# Altium PCB ADCS_BOARD.PcbDoc
Units mm, origin at the board's own origin, x right, y up, seen from the top; angles counter-clockwise.
Board outline 92.58 x 92.46 mm, 2 copper layers (Top Layer, Bottom Layer); 139 components, 123 nets, 584 pads, 134 vias.
Unrouted connection lines stored in the file: 65.
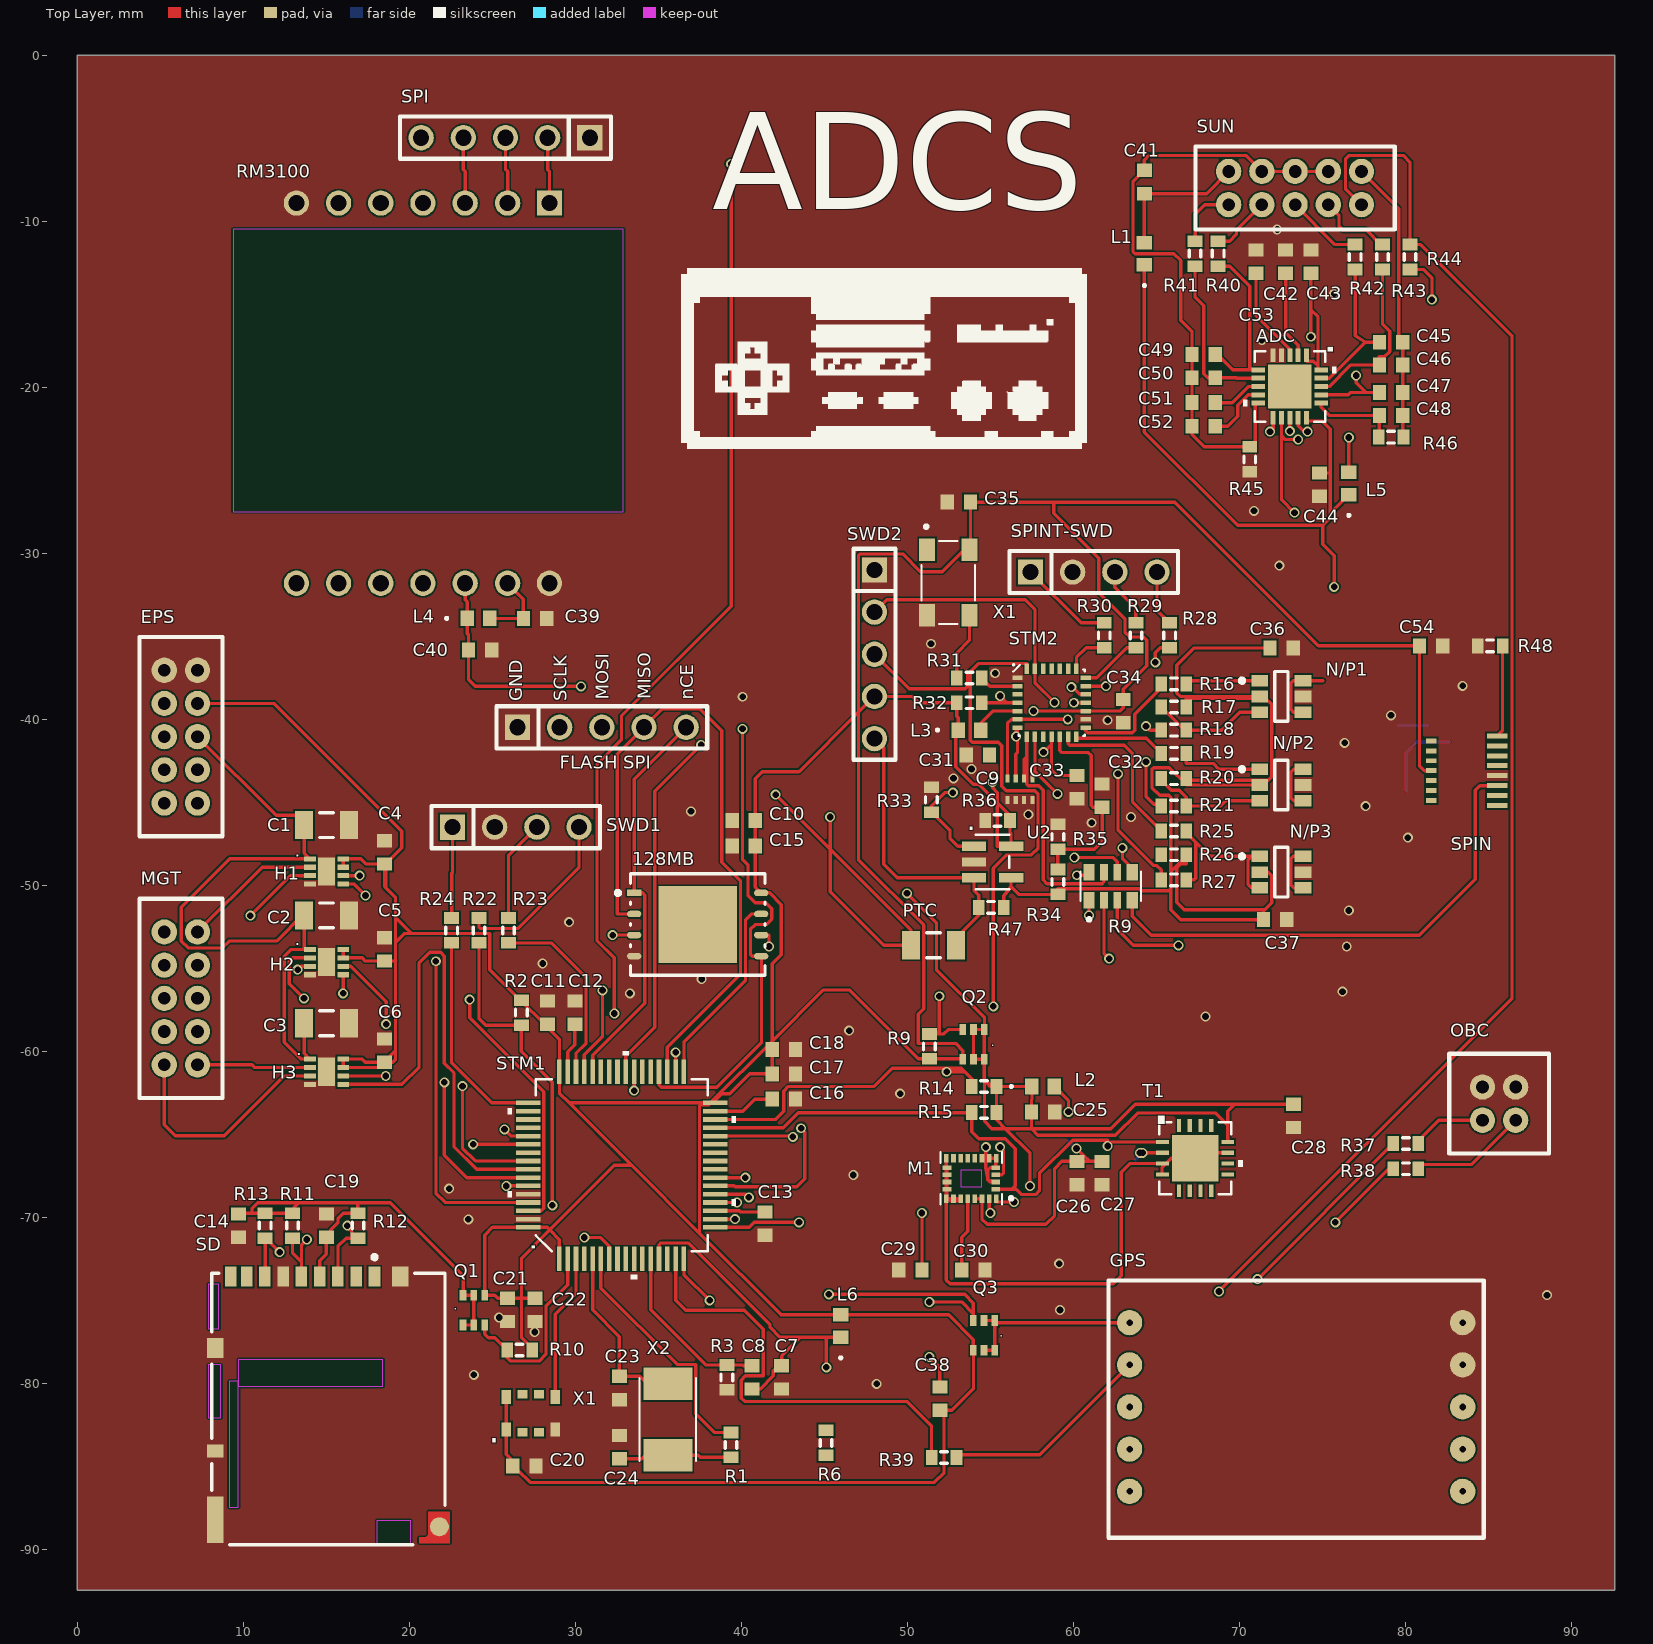
[diagram p0: Top Layer view]
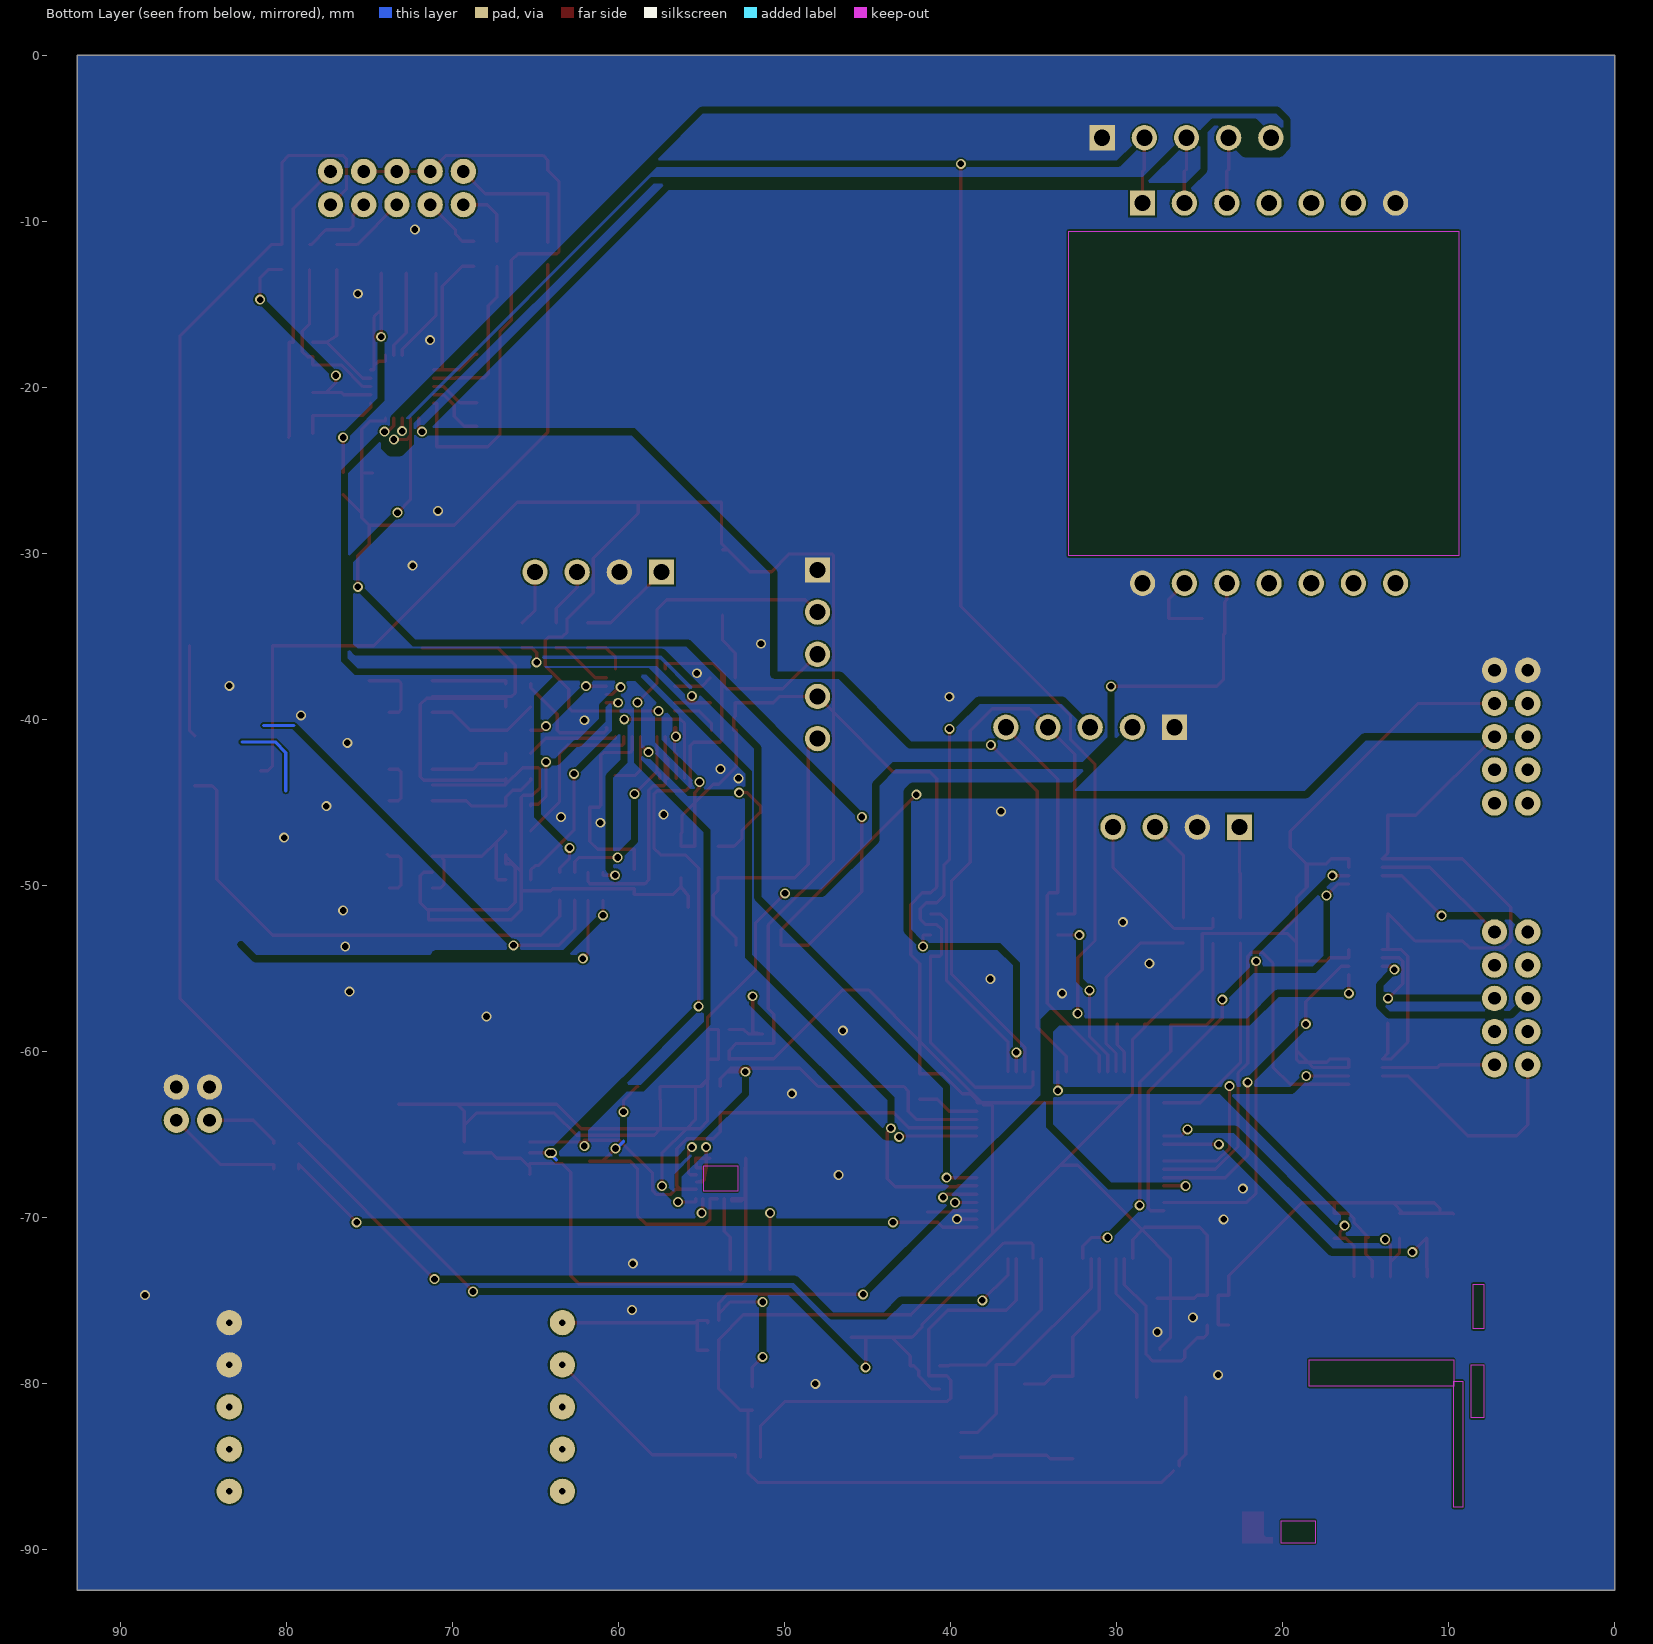
[diagram p1: Bottom Layer view, seen from below]

## Layer stack, top to bottom
Top Solder: solder mask 0.0102, Solder Resist, Dk 3.5
Top Layer: signal copper 0.0356
Dielectric 1: dielectric 0.32, FR-4, Dk 4.8
Bottom Layer: signal copper 0.0356
Bottom Solder: solder mask 0.0102, Solder Resist, Dk 3.5

## Board outline
0,-92.456 92.583,-92.456 92.583,0 0,0

## Design rules (kind name [scope] priority, off if disabled: settings)
Clearance [All] p1: gap=0.1 ignorepadtopadclearanceinfootprint=FALSE
PolygonConnect [All] p1: connectstyle=Direct reliefconductorwidth=0.254 reliefentries=4 polygonreliefangle="90 Angle" airgapwidth=0.254
RoutingTopology [All] p1: topology=Daisy_Simple
RoutingVias [All] p1: holewidth=0.4 width=0.6 viastyle="Through Hole" minholewidth=0.4 minwidth=0.6 maxholewidth=0.4 maxwidth=0.6
SolderMaskExpansion [All] p1: expansion=0.05
UnRoutedNet [All] p1: checkbadconnections=TRUE
Width [All] p1: maxlimit=0.3 minlimit=0.1 preferedwidth=0.2 minimp=50.000000 maximp=50.000000 favimp=50.000000
28 further rules are at their usual default settings.

## Components (designator, comment, footprint, x,y, rotation, side; value= is the part's Value field where it differs from the comment)
128MB "Comment" ISSI_WSON-8_0 37.358,-52.347 r0 top
ADC "Comment" AD 73.025,-19.939 r270 top
C1 "C1" C1206 15,-46.355 r0 top
C2 "C2" C1206 15,-51.8 r0 top
C3 "C3" C1206 15,-58.3 r0 top
C4 "Comment" 1608[0603] 18.5,-48.006 r90 top
C5 "Comment" 1608[0603] 18.5,-53.848 r90 top
C6 "Comment" 1608[0603] 18.5,-59.944 r90 top
C7 "Comment" 1608[0603] 42.418,-79.629 r90 top
C8 "Comment" 1608[0603] 40.64,-79.629 r90 top
C9 "Comment" W2A4ZC104MAT2A 56.769,-44.196 r0 top
C10 "Comment" 1608[0603] 40.132,-46.08 r0 top
C11 "Comment" 1608[0603] 28.305,-57.658 r90 top
C12 "Comment" 1608[0603] 29.96,-57.658 r90 top
C13 "Comment" 1608[0603] 41.402,-70.363 r90 top
C14 "Comment" 1608[0603] 9.688,-70.485 r90 top
C15 "Comment" 1608[0603] 40.132,-47.625 r0 top
C16 "Comment" 1608[0603] 42.545,-62.865 r0 top
C17 "Comment" 1608[0603] 42.545,-61.341 r0 top
C18 "Comment" 1608[0603] 42.545,-59.874 r0 top
C19 "Comment" 1608[0603] 14.986,-70.485 r90 top
C20 "Comment" 1608[0603] 26.924,-84.963 r0 top
C21 "Comment" 1608[0603] 25.908,-75.565 r90 top
C22 "Comment" 1608[0603] 27.559,-75.565 r90 top
C23 "Comment" 1608[0603] 32.639,-80.264 r90 top
C24 "Comment" 1608[0603] 32.639,-83.82 r90 top
C25 "Comment" 1608[0603] 58.166,-63.627 r0 top
C26 "Comment" 1608[0603] 60.198,-67.315 r90 top
C27 "Comment" 1608[0603] 61.722,-67.315 r90 top
C28 "Comment" 1608[0603] 73.234,-63.872 r90 top
C29 "Comment" 1608[0603] 50.165,-73.152 r0 top
C30 "Comment" 1608[0603] 53.962,-73.152 r0 top
C31 "Comment" 1608[0603] 54.229,-42.143 r0 top
C32 "Comment" 1608[0603] 61.722,-44.577 r90 top
C33 "Comment" 1608[0603] 60.198,-44.069 r90 top
C34 "Comment" 1608[0603] 62.992,-39.489 r90 top
C35 "Comment" 1608[0603] 53.086,-26.903 r0 top
C36 "Comment" 1608[0603] 72.534,-35.687 r0 top
C37 "Comment" 1608[0603] 72.136,-52.049 r0 top
C38 "Comment" 1608[0603] 51.943,-80.899 r90 top
C39 "Comment" 1608[0603] 27.559,-33.909 r0 top
C40 "Comment" 1608[0603] 24.257,-35.814 r0 top
C41 "Comment" 1608[0603] 64.262,-7.62 r90 top
C42 "Comment" 1608[0603] 72.771,-12.411 r90 top
C43 "Comment" 1608[0603] 74.295,-12.411 r90 top
C44 "Comment" 1608[0603] 74.803,-25.848 r90 top
C45 "Comment" 1608[0603] 79.121,-17.272 r0 top
C46 "Comment" 1608[0603] 79.121,-18.648 r0 top
C47 "Comment" 1608[0603] 79.121,-20.299 r0 top
C48 "Comment" 1608[0603] 79.121,-21.684 r0 top
C49 "Comment" 1608[0603] 67.834,-18.001 r0 top
C50 "Comment" 1608[0603] 67.834,-19.41 r0 top
C51 "Comment" 1608[0603] 67.834,-20.914 r0 top
C52 "Comment" 1608[0603] 67.834,-22.331 r0 top
C53 "Comment" 1608[0603] 70.993,-12.411 r90 top
C54 "Comment" 1608[0603] 81.534,-35.56 r0 top
Designator1 "5pinSWD" 5pinSWD 1300.734,1233.043 r0 top
EPS "Comment" "2mm pitch con" 7.228,-37.031 r270 top
"FLASH SPI" "Comment" 5pinSWD 26.505,-40.466 r0 top
GPS "Comment" GPS 76.581,-78.232 r180 top
H1 "Comment" ?DRV8837DSGR? 15,-49.149 r0 top
H2 "Comment" ?DRV8837DSGR? 15,-54.61 r0 top
H3 "Comment" ?DRV8837DSGR? 15,-61.214 r0 top
L1 "Comment" IND_BLM18_0603 64.262,-11.938 r90 top
L2 "Comment" IND_BLM18_0603 58.166,-62.103 r0 top
L3 "Comment" IND_BLM18_0603 53.721,-40.64 r0 top
L4 "Comment" IND_BLM18_0603 24.157,-33.909 r0 top
L5 "Comment" IND_BLM18_0603 76.581,-25.781 r90 top
L6 "Comment" IND_BLM18_0603 45.974,-76.533 r90 top
M1 "Comment" *PQFN43P300X350X102-24N 53.838,-67.641 r180 top
MGT "Comment" "2mm pitch con" 7.228,-52.795 r270 top
N/P1 "Comment" FDC6333C 72.517,-38.608 r0 top
N/P2 "Comment" FDC6333C 72.517,-43.942 r0 top
N/P3 "Comment" FDC6333C 72.517,-49.192 r0 top
OBC "Comment" 2mm4way2row 84.63,-64.135 r90 top
PTC "Comment" C1206 51.562,-53.594 r0 top
Q1 "Comment" Si1401EDH 23.228,-76.466 r0 top
Q2 "Comment" Si1401EDH 54.623,-58.674 r180 top
Q3 "Comment" Si1401EDH 55.258,-76.2 r180 top
R1 "Comment" J1-0603 39.37,-83.693 r90 top
R2 "Comment" J1-0603 26.734,-57.658 r90 top
R3 "Comment" J1-0603 39.116,-79.629 r90 top
R6 "Comment" J1-0603 45.085,-83.566 r90 top
R9 "Comment" J1-0603 51.308,-59.69 r90 top
R9 "Comment" EXB 62.23,-50.038 r90 top
R10 "Comment" J1-0603 26.632,-77.978 r0 top
R11 "Comment" J1-0603 12.954,-70.485 r90 top
R12 "Comment" J1-0603 16.891,-70.485 r90 top
R13 "Comment" J1-0603 11.303,-70.485 r90 top
R14 "Comment" J1-0603 54.61,-62.103 r0 top
R15 "Comment" J1-0603 54.61,-63.659 r0 top
R16 "Comment" J1-0603 66.04,-37.846 r0 top
R17 "Comment" J1-0603 66.04,-39.243 r0 top
R18 "Comment" J1-0603 66.04,-40.64 r0 top
R19 "Comment" J1-0603 66.04,-42.037 r0 top
R20 "Comment" J1-0603 66.04,-43.561 r0 top
R21 "Comment" J1-0603 66.04,-45.212 r0 top
R22 "Comment" J1-0603 24.186,-52.705 r90 top
R23 "Comment" J1-0603 25.964,-52.705 r90 top
R24 "Comment" J1-0603 22.535,-52.705 r90 top
R25 "Comment" J1-0603 66.04,-46.711 r0 top
R26 "Comment" J1-0603 66.04,-48.142 r0 top
R27 "Comment" J1-0603 66.04,-49.657 r0 top
R28 "Comment" J1-0603 65.786,-34.925 r90 top
R29 "Comment" J1-0603 63.754,-34.925 r90 top
R30 "Comment" J1-0603 61.849,-34.925 r90 top
R31 "Comment" J1-0603 53.721,-37.496 r0 top
R32 "Comment" J1-0603 53.721,-38.989 r0 top
R33 "Comment" J1-0603 51.435,-44.831 r90 top
R34 "Comment" J1-0603 59.055,-49.784 r90 top
R35 "Comment" J1-0603 59.055,-47.061 r90 top
R36 "Comment" J1-0603 55.423,-46.08 r0 top
R37 "Comment" J1-0603 80.01,-65.532 r0 top
R38 "Comment" J1-0603 80.01,-67.056 r0 top
R39 "Comment" J1-0603 52.197,-84.455 r0 top
R40 "Comment" J1-0603 68.707,-11.938 r90 top
R41 "Comment" J1-0603 67.31,-11.938 r90 top
R42 "Comment" J1-0603 76.962,-12.138 r90 top
R43 "Comment" J1-0603 78.613,-12.138 r90 top
R44 "Comment" J1-0603 80.264,-12.138 r90 top
R45 "Comment" J1-0603 70.612,-24.324 r90 top
R46 "Comment" J1-0603 79.121,-22.987 r0 top
R47 "Comment" J1-0603 55.034,-51.308 r0 top
R48 "Comment" J1-0603 85.09,-35.56 r0 top
RM3100 "Comment" RM3100 28.428,-31.79 r180 top
SD "Comment" Hirose_Electric_DM3AT-SF-PEJM5_0 15.113,-81.534 r0 top
SPI "Comment" 5pinSWD 30.861,-4.953 r180 top
SPIN "Comment" FH23-15S-0.3SHAW 83.439,-43.081 r90 top
SPINT-SWD "Comment" 4pinSWD 57.404,-31.115 r0 top
STM1 "Comment" LQFP-64 32.778,-66.84 r90 top
STM2 "Comment" *QFN50P400X400X60-28N 58.674,-38.989 r0 top
SUN "Comment" "2mm pitch con" 69.342,-6.985 r0 top
SWD1 "Comment" 4pinSWD 22.591,-46.482 r0 top
SWD2 "Comment" 5pinSWD 48.006,-30.988 r270 top
T1 "Comment" ADT 67.32,-66.421 r0 top
U2 "Comment" INA139 55.118,-48.578 r0 top
X1 "Comment" ?KT3225T3 27.305,-81.788 r0 top
X1 "Comment" *OSC_ECS-TXO-5032-120-TR 52.451,-31.75 r270 top
X2 "Comment" ABM3XTAL 35.56,-82.169 r90 top

## Footprints (in the part's own frame and the unit in brackets; to place one, negate y for a bottom-side part, rotate by r counter-clockwise, add the part's x,y. Pads: shape width x height; smd on the part's side, far side on the other; paste and mask are expansions set on the pad)
2mm4way2row [mil]
  round 60 hole 30: 1(0,0) 2(78.74,0) 3(0,-78.74) 4(78.74,-78.74)
  silkscreen extent -79,-157 157,79, body extent -92,-163 170,85, height 252
"2mm pitch con" [mil]
  round 60 hole 30: 1(0,0) 2(0,-78.74) 3(78.74,0) 4(78.74,-78.74) 5(157.48,0) 6(157.48,-78.74) 7(236.22,0) 8(236.22,-78.74) 9(314.96,0) 10(314.96,-78.74)
  silkscreen extent -79,-138 394,59, body extent -79,-138 394,59, height 260
4pinSWD [mil]
  rect 60x60 hole 38.19: 1(0,0)
  round 60 hole 38.19: 2(100,0) 3(200,0) 4(300,0)
  silkscreen extent -50,-50 350,50
5pinSWD [mil]
  rect 60x60 hole 38.19: 1(0,0)
  round 60 hole 38.19: 2(100,0) 3(200,0) 4(300,0) 5(400,0)
  silkscreen extent -50,-50 450,50
1608[0603] [mm] "Chip Capacitor, Body 1.6x0.8mm, IPC High Density"
  rect 0.8x0.9 smd: 1(-0.7,0) 2(0.7,0)
  body extent -0.87,-0.48 0.87,0.48, height 1.3
*OSC_ECS-TXO-5032-120-TR [mm]
  rect 1.35x0.95 smd: 1(-1.975,-1.275) 2(1.975,-1.275) 3(1.975,1.275) 4(-1.975,1.275)
  silkscreen extent -3.47,-1.6 2.5,1.6
*PQFN43P300X350X102-24N [mm]
  rect 0.28x0.53 smd: 1(-1.505,1.22) 6(-1.505,-1.22) 7(-1.075,-1.22) 8(-0.645,-1.22) 9(-0.215,-1.22) 10(0.215,-1.22) 11(0.645,-1.22) 12(1.075,-1.22) 13(1.505,-1.22) 18(1.505,1.22) 19(1.075,1.22) 20(0.645,1.22) 21(0.215,1.22) 22(-0.215,1.22) 23(-0.645,1.22) 24(-1.075,1.22)
  rect 0.53x0.28 smd: 2(-1.47,0.645) 3(-1.47,0.215) 4(-1.47,-0.215) 5(-1.47,-0.645) 14(1.47,-0.645) 15(1.47,-0.215) 16(1.47,0.215) 17(1.47,0.645)
  Top Layer keep-out region: -0.645,-0.508 0.645,-0.508 0.645,0.508 -0.645,0.508
  Bottom Layer keep-out region: -1.016,-0.762 1.016,-0.762 1.016,0.762 -1.016,0.762
  silkscreen extent -2.5,-1.58 1.86,1.58
*QFN50P400X400X60-28N [mm]
  rect 0.62x0.27 smd: 1(-2.055,1.5) 2(-2.055,1) 3(-2.055,0.5) 4(-2.055,0) 5(-2.055,-0.5) 6(-2.055,-1) 7(-2.055,-1.5) 15(2.055,-1.5) 16(2.055,-1) 17(2.055,-0.5) 18(2.055,0) 19(2.055,0.5) 20(2.055,1) 21(2.055,1.5)
  rect 0.27x0.62 smd: 8(-1.5,-2.055) 9(-1,-2.055) 10(-0.5,-2.055) 11(0,-2.055) 12(0.5,-2.055) 13(1,-2.055) 14(1.5,-2.055) 22(1.5,2.055) 23(1,2.055) 24(0.5,2.055) 25(0,2.055) 26(-0.5,2.055) 27(-1,2.055) 28(-1.5,2.055)
  silkscreen extent -2.34,-2 2,2.34
?DRV8837DSGR? [mil]
  rect 28x12 smd: 1(-39.5,30) 2(-39.5,10) 3(-39.5,-10) 4(-39.5,-30) 5(39.5,-30) 6(39.5,-10) 7(39.5,10) 8(39.5,30)
  rect 40x67 smd paste-33 mask+0: 9(0,0)
  body extent 0,0 10,10, height 10
?KT3225T3 [mm]
  rect 0.55x0.85 smd: 1(-1.475,0.975) 4(1.475,0.975) 5(-1.475,-0.975) 8(1.475,-0.975)
  rect 0.6x0.5 smd: 2(-0.5,1.15) 3(0.5,1.15) 6(-0.5,-1.15) 7(0.5,-1.15)
ABM3XTAL [mm]
  rect 1.95x2.95 smd: 1(-2.15,0) 2(2.15,0)
  silkscreen extent -2.5,-1.7 2.5,1.7
AD [mil]
  rect 32x12 smd: 1(-74.5,39.37) 2(-74.5,19.69) 3(-74.5,0) 4(-74.5,-19.68) 5(-74.5,-39.37) 11(74.5,-39.37) 12(74.5,-19.68) 13(74.5,0) 14(74.5,19.69) 15(74.5,39.37)
  rect 12x32 smd: 6(-39.37,-74.5) 7(-19.69,-74.5) 8(0,-74.5) 9(19.68,-74.5) 10(39.37,-74.5) 16(39.37,74.5) 17(19.68,74.5) 18(0,74.5) 19(-19.69,74.5) 20(-39.37,74.5)
  rect 104x104 smd paste-51.5 mask+0: 21(0,0)
  silkscreen extent -84,-110 84,110, body extent 0,0 10,10, height 10
ADT [mil]
  rect 30x10 smd paste+0 mask+3.94: 1(-77.5,38.39) 2(-77.5,12.8) 3(-77.5,-12.8) 4(-77.5,-38.39) 9(77.5,-38.39) 10(77.5,-12.8) 11(77.5,12.8) 12(77.5,38.39)
  rect 10x30 smd paste+0 mask+3.94: 5(-38.39,-77.5) 6(-12.8,-77.5) 7(12.8,-77.5) 8(38.39,-77.5) 13(38.39,77.5) 14(12.8,77.5) 15(-12.8,77.5) 16(-38.39,77.5)
  rect 110x110 smd paste-54.5 mask+0: 17(0,0)
  silkscreen extent -85,-86 112,86, body extent 0,0 10,10, height 10
C1206 [mm] "Chip Capacitor, Body 3.2x1.6mm, IPC High Density"
  rect 1.1x1.7 smd: 1(-1.35,0) 2(1.35,0)
  silkscreen extent -0.4,-0.75 0.4,0.75, body extent -1.7,-0.9 1.7,0.9, height 1.3
EXB [mm]
  rect 0.98x0.68 smd: 1(-0.845,1.3) 4(-0.845,-1.3) 5(0.845,-1.3) 8(0.845,1.3)
  rect 0.98x0.48 smd: 2(-0.845,0.4) 3(-0.845,-0.4) 6(0.845,-0.4) 7(0.845,0.4)
  silkscreen extent -2.1,-1.82 0.88,1.82
FDC6333C [mm]
  rect 1x0.7 smd paste+0 mask+0: 1(-1.3,0.95) 2(-1.3,0) 3(-1.3,-0.95) 4(1.3,-0.95) 5(1.3,0) 6(1.3,0.95)
  silkscreen extent -2.5,-1.5 0.4,1.5, body extent -1.9,-1.85 1.9,1.85, height 0.25
FH23-15S-0.3SHAW [mm]
  rect 0.3x0.65 smd: 1(-1.8,1.9) 2(-1.2,1.9) 3(-0.6,1.9) 4(0,1.9) 5(0.6,1.9) 6(1.2,1.9) 7(1.8,1.9)
  rect 0.3x1.25 smd: 8(-2.1,-2.075) 9(-1.5,-2.075) 10(-0.9,-2.075) 11(-0.3,-2.075) 12(0.3,-2.075) 13(0.9,-2.075) 14(1.5,-2.075) 15(2.1,-2.075)
  body extent -3.5,-2.64 3.5,2.16, height 1.24
GPS [mil]
  round 60 hole 15.75: 2(-270,325) 2(-270,-75) 2(-270,25) 2(-270,125) 2(-270,225) 2(520,-75) 2(520,25) 2(520,125) 2(520,225) 2(520,325)
  silkscreen extent -320,-175 570,435, body extent -270,-155 517,416, height 122
Hirose_Electric_DM3AT-SF-PEJM5_0 [mm]
  rect 0.7x1.2 smd paste+0 mask+0: 1(2.775,7.975) 2(1.675,7.975) 3(0.575,7.975) 4(-0.525,7.975) 5(-1.625,7.975) 6(-2.725,7.975) 7(-3.825,7.975) 8(-4.925,7.975) 9(-5.875,7.975)
  rect 1x0.8 smd paste+0 mask+0: 10(-6.825,-2.525)
  rect 1x1.2 smd paste+0 mask+0: 11(4.325,7.975) 12(-6.825,3.675)
  rect 1x2.8 smd paste+0 mask+0: 13(-6.825,-6.675)
  round 1.145 smd paste+0 mask+0: 14(6.689,-7.092)
  Top Layer region: 6.025,-6.175 7.325,-6.175 7.325,-8.075 5.475,-8.075 5.475,-7.725 5.875,-7.725 6.025,-7.575 6.025,-6.175
  Keep-Out Layer region: 2.925,-8.075 4.953,-8.075 4.953,-6.725 2.925,-6.725
  Keep-Out Layer region: -5.425,1.375 3.275,1.375 3.275,2.975 -5.425,2.975
  Keep-Out Layer region: -5.969,-5.925 -5.425,-5.925 -5.425,1.675 -5.969,1.675
  Keep-Out Layer region: -7.225,-0.525 -6.475,-0.525 -6.475,2.667 -7.225,2.667
  Keep-Out Layer region: -7.225,4.826 -6.604,4.826 -6.604,7.525 -7.225,7.525
  silkscreen extent -7.02,-8.17 7.02,9.27, body extent -7.42,-8.27 7.43,8.67, height 0.25
INA139 [mil]
  rect 58x22 smd: 1(-44,37.4) 2(-44,0) 3(-44,-37.4) 4(44,-37.4) 5(44,37.4)
  silkscreen extent -40,-65 40,65, body extent 0,0 10,10, height 10
IND_BLM18_0603 [mil]
  rect 32x37 smd: 1(-26.5,0) 2(26.5,0)
  silkscreen extent -78,-3 -73,3, body extent 0,0 10,10, height 10
ISSI_WSON-8_0 [mm]
  rect 0.861x0.392 smd paste+0 mask+0: 1(-3.826,1.905)
  oval 0.861x0.392 smd paste+0 mask+0: 2(-3.826,0.635) 3(-3.826,-0.635) 4(-3.826,-1.905) 5(3.826,-1.905) 6(3.826,-0.635) 7(3.826,0.635) 8(3.826,1.905)
  rect 4.75x4.65 smd paste-1000 mask+0: 9(0,0)
  silkscreen extent -4.93,-3.05 4.05,3.05, body extent -4.36,-3.15 4.36,3.15, height 0.25
J1-0603 [mm] "Chip Resistor, Body 1.6x0.8mm, IPC High Density"
  rect 0.7x0.9 smd: 1(-0.75,0) 2(0.75,0)
  silkscreen extent -0.2,-0.35 0.2,0.35, body extent -0.85,-0.48 0.85,0.48, height 0.9
LQFP-64 [mil]
  rect 58x11 smd: 1(-221.5,147.64) 2(-221.5,127.95) 3(-221.5,108.27) 4(-221.5,88.58) 5(-221.5,68.9) 6(-221.5,49.21) 7(-221.5,29.53) 8(-221.5,9.84) 9(-221.5,-9.84) 10(-221.5,-29.53) 11(-221.5,-49.21) 12(-221.5,-68.9) 13(-221.5,-88.58) 14(-221.5,-108.27) 15(-221.5,-127.95) 16(-221.5,-147.64) 33(221.5,-147.64) 34(221.5,-127.95) 35(221.5,-108.27) 36(221.5,-88.58) 37(221.5,-68.9) 38(221.5,-49.21) 39(221.5,-29.53) 40(221.5,-9.84) 41(221.5,9.84) 42(221.5,29.53) 43(221.5,49.21) 44(221.5,68.9) 45(221.5,88.58) 46(221.5,108.27) 47(221.5,127.95) 48(221.5,147.64)
  rect 11x58 smd: 17(-147.64,-221.5) 18(-127.95,-221.5) 19(-108.27,-221.5) 20(-88.58,-221.5) 21(-68.9,-221.5) 22(-49.21,-221.5) 23(-29.53,-221.5) 24(-9.84,-221.5) 25(9.84,-221.5) 26(29.53,-221.5) 27(49.21,-221.5) 28(68.9,-221.5) 29(88.58,-221.5) 30(108.27,-221.5) 31(127.95,-221.5) 32(147.64,-221.5) 49(147.64,221.5) 50(127.95,221.5) 51(108.27,221.5) 52(88.58,221.5) 53(68.9,221.5) 54(49.21,221.5) 55(29.53,221.5) 56(9.84,221.5) 57(-9.84,221.5) 58(-29.53,221.5) 59(-49.21,221.5) 60(-68.9,221.5) 61(-88.58,221.5) 62(-108.27,221.5) 63(-127.95,221.5) 64(-147.64,221.5)
  silkscreen extent -270,-270 270,270, body extent 0,0 10,10, height 10
RM3100 [mil]
  round 60 hole 38.19: 1(0,0) 2(99.21,0) 2(99.21,-901.57) 3(200,0) 3(200,-901.57) 4(300,0) 4(300,-901.57) 5(400,0) 5(400,-901.57) 6(500,0) 6(500,-901.57) 7(600,0) 7(600,-901.57)
  rect 60x60 hole 38.19: 1(0,-901.57)
  Top Layer keep-out region: -175,-840 750,-840 750,-170 -175,-170
  Bottom Layer keep-out region: -175,-835 750,-835 750,-65 -175,-65
Si1401EDH [mm]
  rect 0.406x0.648 smd mask+0.05: 1(0,0) 2(0.648,0) 3(1.296,0) 4(0,1.79) 5(0.648,1.79) 6(1.296,1.79)
W2A4ZC104MAT2A [mm]
  rect 0.25x0.5 smd: 8(-0.75,-0.65) 8(-0.75,0.65) 8(-0.25,-0.65) 8(-0.25,0.65) 8(0.25,-0.65) 8(0.25,0.65) 8(0.75,-0.65) 8(0.75,0.65)

## Part data
128MB: "IS25LP016D"
C1 C2 C3: "10u"
C4 C5 C6 C28 C41 C42 C43 C44 C53: "100n"
C29: "100nF"
C30: "1nF"
PTC: "PTC"
R48: "10k"

## Via types
v1: diameter 0.6, hole 0.4, Top Layer to Bottom Layer, 134 vias

## Nets (pads, with @x,y where several pads share a name; then routed paths per layer and width w, separated by ;. In a path a pad name is that pad's centre, name@x,y a point inside that pad or via, vN(x,y) a via of type N, cw(c..) or ccw(c..) an arc to the next point about the centre after c; other vN are vias at no path point)
3.3V: 128MB.8 C4.1 C5.1 C6.1 C10.2 C11.1 C15.2 C17.1 C18.1 C20.1 C21.2 C22.2 C34.2 C35.2 C38.1 C54.1 EPS.3 EPS.4 H1.7 H1.8 H2.7 H2.8 H3.7 H3.8 L3.1 L6.2 Q1.6 Q2.6 Q3.6 R2.2 R9.1@51.308,-60.44 R10.2 R32.1 R36.2 SPIN.4 STM1.1 STM1.32 STM1.48 STM1.64 STM2.17 SWD2.4 U2.5 X1.1@25.83,-80.813 X1.4@53.726,-29.775 X1.5 | length 367.5
  Top Layer w0.2: EPS.3 11.828,-39.031 19.533,-46.736 19.533,-47.723 18.567,-48.689 18.567,-50.126 ; H2.8 H2.7 17.145,-54.356 17.337,-54.548 C5.1 19.152,-54.548 ; H1.7 H1.8 17.069,-48.387 17.388,-48.706 C4.1 18.5,-50.058 18.567,-50.126 ; 19.163,-54.548 19.152,-54.548 ; X1.1@25.83,-80.813 X1.5 25.83,-84.256 26.224,-84.65 C20.1 ; C20.1@26.563,-85.237 27.28,-85.954 51.613,-85.954 52.197,-85.369 C38.1@52.197,-81.599 ; R2.2 R2.2@26.682,-56.908 ; R10.2 27.382,-77.876 26.747,-77.242 26.747,-74.865 ; C22.2 26.747,-74.865 ; STM1.1 29.028,-71.323 28.446,-70.741 ; 51.867,-75.87 42.393,-75.87 42.382,-75.86 ; C38.1 C38.1@52.197,-81.599 ; Q2.6 Q2.6@53.327,-60.427 ; Q3.6 53.962,-77.343 52.479,-75.86 L6.2 42.382,-75.86 ; Q3.6@53.975,-77.978 53.975,-80.289 52.665,-81.599 C38.1@52.197,-81.599 ; v1(55.116,-43.757) 55.116,-44.121 55.394,-44.399 55.394,-45.005 ; v1(57.587,-39.489) STM2.17 62.789,-39.489 62.992,-39.286 C34.2 62.992,-38.176 64.414,-36.754 64.414,-35.23 64.211,-35.027 63.373,-35.027 63.094,-34.747 63.094,-33.934 61.519,-32.36 61.519,-30.277 58.801,-27.559 58.801,-26.924 ; SPIN.4 81.133,-43.081 80.834,-42.782 C54.1 74.752,-35.56 66.096,-26.903 C35.2 53.786,-29.399 X1.4@53.416,-29.769 ; C6.1@18.452,-60.644 19.152,-59.944 ; C6.1@18.452,-60.644 18.136,-60.96 H3.7 H3.8 17.145,-60.452 17.337,-60.644 C6.1@18.452,-60.644 ; C6.1@18.452,-60.644 C6.1 18.999,-60.644 19.152,-60.492 19.152,-59.944 ; 18.567,-50.126 19.152,-50.71 19.152,-51.918 ; 19.152,-59.944 19.152,-54.548 ; 19.152,-54.548 19.152,-53.442 ; 19.152,-53.442 19.152,-51.918 ; 19.152,-53.442 19.71,-52.883 20.117,-52.883 ; 19.152,-51.918 20.117,-52.883 ; 20.117,-52.883 24.841,-52.883 24.841,-55.067 R2.2@26.682,-56.908 ; R2.2@26.682,-56.908 C11.1@28.132,-58.358 ; 26.747,-74.865 26.747,-72.44 28.446,-70.741 ; 26.747,-74.865 C21.2 25.31,-74.865 25.121,-74.676 Q1.6 24.524,-71.06 24.994,-70.59 STM1.64 28.295,-70.59 28.446,-70.741 ; C11.1@28.132,-58.358 C11.1@28.305,-58.531 ; C11.1@28.132,-58.358 C11.1 C11.1@28.305,-58.531 ; C11.1@28.305,-58.531 29.032,-59.258 29.032,-62.509 29.613,-63.09 ; 28.446,-70.741 32.334,-66.853 33.376,-66.853 ; 29.613,-63.09 33.376,-66.853 ; 29.613,-63.09 STM1.32@38.129,-63.09 ; 33.376,-66.853 37.465,-70.942 ; 37.465,-70.942 42.382,-75.86 ; 37.465,-70.942 37.465,-63.297 37.567,-63.195 38.024,-63.195 STM1.32@38.129,-63.09 ; STM1.32@38.129,-63.09 41.845,-59.374 ; STM1.32@38.129,-63.09 STM1.32 38.404,-62.942 38.811,-62.535 39.294,-62.535 40.488,-61.341 C17.1 C18.1 41.845,-59.374 ; 41.845,-59.374 41.845,-54.712 42.396,-54.161 42.396,-51.148 41.69,-50.442 128MB.8 40.832,-50.091 C15.2 C10.2 40.832,-43.569 41.25,-43.152 43.462,-43.152 47.041,-39.573 ; 41.845,-59.374 44.933,-56.286 46.494,-56.286 50.648,-60.44 51.308,-60.44 51.321,-60.427 Q2.6@53.327,-60.427 ; 47.041,-39.573 SWD2.4 50.292,-38.608 50.673,-38.989 R32.1 52.971,-39.801 53.048,-39.878 L3.1 52.908,-40.64 52.908,-42.839 53.969,-43.9 54.288,-43.9 55.394,-45.005 ; 47.041,-39.573 47.041,-30.124 47.142,-30.023 49.708,-30.023 50.775,-31.09 52.095,-31.09 X1.4@53.416,-29.769 ; 47.041,-39.573 47.041,-48.437 50.978,-52.374 50.978,-57.429 50.648,-57.76 50.648,-59.512 52.895,-59.512 53.327,-59.944 Q2.6@53.327,-60.427 ; X1.4@53.416,-29.769 X1.4@53.726,-29.769 ; X1.4@53.726,-29.769 53.726,-29.775 X1.4@53.726,-29.769 ; 55.394,-45.005 56.173,-45.784 R36.2 56.173,-46.826 56.236,-46.888 U2.5 55.394,-47.628 55.394,-45.005
3.3V_SEN: C25.1 C28.2 C40.1 L2.1 L4.1 M1.1 M1.3 M1.5 M1.6 M1.7 M1.8 Q2.1 Q2.2 Q2.4 Q2.5 R14.2 R15.2 RM3100.3@23.348,-31.79 T1.12 | length 89.2
  Top Layer w0.2: RM3100.3@23.348,-31.79 23.348,-32.782 23.484,-32.918 L4.1 23.484,-34.826 23.557,-34.9 C40.1 23.557,-37.592 23.963,-37.998 v1(30.328,-37.998) ; v1(49.962,-50.47) 51.74,-52.248 51.74,-55.067 54.635,-57.963 54.635,-61.671 ; M1.8 54.712,-66.421 ; v1(54.712,-65.761) 54.712,-66.421 ; M1.1 55.343,-69.063 v1(56.413,-69.063) ; v1(57.379,-68.097) 57.379,-66.128 55.893,-64.643 ; T1.12 69.289,-64.437 ; C28.2 69.698,-63.172 ; 54.623,-61.659 54.635,-61.671 ; 54.623,-61.659 54.635,-61.675 ; 54.623,-61.659 Q2.4 ; Q2.4 Q2.1 Q2.2 Q2.5 Q2.4 ; 54.635,-61.675 54.966,-62.103 R14.2@55.067,-62.103 ; 54.635,-61.675 54.635,-61.671 ; 54.635,-61.675 54.635,-64.211 55.067,-64.643 55.893,-64.643 ; 54.635,-61.671 R14.2@55.067,-62.103 ; 54.712,-66.421 54.712,-66.996 54.839,-67.729 ; 54.712,-66.421 M1.7 M1.6 55.343,-66.716 55.308,-66.751 M1.5 54.966,-66.996 54.839,-67.123 54.839,-67.729 ; 54.839,-67.729 M1.3 54.966,-67.856 54.839,-67.729 ; R14.2@55.067,-62.103 R14.2 ; R14.2 L2.1 57.493,-62.864 57.466,-62.89 C25.1 57.466,-64.643 ; R14.2 R15.2 55.36,-64.11 55.893,-64.643 ; 55.893,-64.643 57.466,-64.643 ; 57.466,-64.643 62.23,-64.643 63.701,-63.172 69.698,-63.172 ; 57.466,-64.643 57.466,-64.654 57.849,-65.037 62.522,-65.037 63.856,-63.703 68.555,-63.703 69.289,-64.437 ; 69.289,-64.437 69.289,-63.581 69.698,-63.172
3.3Vref: ADC.17 C47.1 R44.1 | length 7.7
  Top Layer w0.2: ADC.17 76.556,-20.439 76.695,-20.299 77.607,-20.299 ; v1(77.018,-19.274) 77.018,-19.71 77.607,-20.299 ; C47.1 77.607,-20.299 ; R44.1 81.077,-12.888 81.585,-13.396 v1(81.585,-14.707)
3.3VrefR: C7.2 C8.1 L6.1 R44.2 STM1.13 SUN.10 | length 106.3
  Top Layer w0.2: STM1.13 35.028,-71.628 35.13,-71.526 36.779,-71.526 41.714,-76.462 41.714,-76.606 42.314,-77.206 43.546,-77.206 ; C8.1 41.119,-80.329 41.917,-79.531 41.917,-79.23 42.218,-78.929 C7.2 42.418,-78.334 43.546,-77.206 ; v1(45.11,-79.019) 45.11,-77.206 ; L6.1 45.11,-77.206 ; v1(68.758,-74.447) 86.411,-56.794 86.411,-16.9 80.899,-11.388 R44.2 80.264,-6.426 79.858,-6.02 76.606,-6.02 76.378,-6.248 76.378,-8.021 SUN.10 ; 43.546,-77.206 45.11,-77.206
5V: ADC.15 C1.1 C2.1 C3.1 C44.2 EPS.5 EPS.6 H1.1 H2.1 H3.1 L1.1 L5.1 PTC.1 | length 104.1
  Top Layer w0.2: EPS.5 11.967,-45.771 13.65,-45.771 C1.1 13.65,-48.04 H1.1 9.169,-48.387 6.248,-51.308 6.248,-53.34 6.665,-53.757 8.715,-53.757 9.131,-53.34 11.989,-53.34 C2.1@13.64,-51.689 ; C3.1 13.65,-60.105 H3.1 13.487,-60.452 12.459,-59.423 12.459,-54.267 12.878,-53.848 H2.1@13.65,-53.848 ; C2.1 H2.1@13.65,-53.848 ; H2.1 H2.1@13.65,-53.848 ; v1(42.059,-44.526) 45.339,-47.807 ; v1(45.339,-45.872) 45.339,-47.807 ; L1.1 64.262,-22.682 69.875,-28.296 75.006,-28.296 ; ADC.15 74.025,-22.016 74.27,-22.016 74.276,-22.022 74.981,-22.022 75.463,-22.504 75.463,-25.195 ; C44.2 75.416,-25.148 75.463,-25.195 ; v1(75.692,-32.004) 75.692,-30.128 75.006,-29.442 75.006,-28.296 ; L5.1 75.463,-27.572 ; 45.339,-47.807 45.339,-50.368 48.565,-53.594 PTC.1 50.212,-52.68 45.339,-47.807 ; 75.006,-28.296 75.463,-27.838 75.463,-27.572 ; 75.463,-27.572 75.463,-25.195
5V_ST: PTC.2 R47.1 SWD2.5 U2.3 | length 18.3
  Top Layer w0.2: SWD2.5 48.563,-41.705 48.563,-48.721 49.369,-49.528 U2.3 54,-50.288 54.284,-50.571 R47.1 54.284,-51.79 52.912,-53.162 PTC.2
5V_STEN: C36.1 C37.1 N/P1.2 N/P2.2 N/P3.2 R17.2 R20.2 R26.2 R34.1 R47.2 U2.4 | length 76.8
  Top Layer w0.2: R47.2 55.784,-50.648 56.236,-50.077 ; U2.4 56.236,-50.077 ; R26.2 R26.2@66.79,-48.235 ; R17.2 66.79,-38.71 N/P1.2@71.217,-38.71 ; N/P3.2 71.73,-49.192 71.933,-49.395 71.933,-51.04 71.512,-51.46 ; N/P2.2 R20.2@66.802,-43.942 ; C36.1 67.259,-35.687 66.218,-36.728 66.218,-38.405 66.421,-38.608 N/P1.2 N/P1.2@71.217,-38.71 ; 56.236,-50.077 56.693,-50.534 R34.1 59.055,-50.19 63.957,-50.19 64.084,-50.317 65.735,-50.317 65.862,-50.19 ; 65.862,-50.19 65.862,-49.162 ; 65.862,-50.19 65.862,-51.465 66.446,-52.049 C37.1 71.436,-51.537 71.512,-51.46 ; 65.862,-49.162 65.862,-44.689 65.735,-44.562 65.187,-44.562 64.719,-44.094 64.719,-43.002 64.821,-42.901 65.761,-42.901 R20.2@66.802,-43.942 ; 65.862,-49.162 R26.2@66.79,-48.235 ; R26.2@66.79,-48.235 66.79,-48.692 66.446,-48.692 66.218,-48.92 66.218,-51.003 66.675,-51.46 71.512,-51.46 ; R20.2@66.793,-43.663 66.79,-43.663 R20.2 R20.2@66.793,-43.663 ; R20.2@66.793,-43.663 71.73,-43.663 71.933,-43.459 71.933,-39.091 71.552,-38.71 N/P1.2@71.217,-38.71 ; R20.2@66.793,-43.663 R20.2@66.802,-43.942
AD: R16.1 STM2.15 | length 6.7
  Top Layer w0.2: STM2.15 60.706,-40.489 60.706,-40.64 60.858,-40.792 63.525,-40.792 63.678,-40.64 63.678,-39.687 65.29,-38.075 R16.1
AD_R: N/P1.1 R16.2 | length 4.6
  Top Layer w0.2: R16.2 66.79,-37.658 N/P1.1
ADC_REF: ADC.2 C42.1 | length 5.2
  Top Layer w0.2: C42.1 72.771,-16.696 73.525,-17.45 ADC.2
ADC_REFIN: ADC.3 C53.1 | length 5.8
  Top Layer w0.2: C53.1 70.993,-15.672 73.025,-17.704 ADC.3
ADC_VDD: ADC.1 ADC.20 C43.1 L5.2 | length 11.1
  Top Layer w0.2: ADC.1 74.025,-18.415 74.447,-18.415 74.727,-18.694 ; v1(74.295,-16.942) 74.295,-15.316 ; C43.1 74.295,-15.316 ; ADC.20 74.727,-18.939 74.727,-18.694 ; L5.2 v1(76.581,-23.012) ; 74.295,-15.316 74.727,-15.748 74.727,-18.694
Am: C9.8@56.519,-43.546 R9.5 STM2.7 | length 5.4
  Top Layer w0.2: C9.8@56.519,-43.546 56.519,-42.088 56.619,-41.988 STM2.7 56.54,-40.489 v1(56.54,-41.021) ; v1(62.941,-47.727) 62.941,-48.357 63.53,-48.946 R9.5
Am_RE: R9.4 SPIN.10 | length 30.3
  Top Layer w0.2: R9.4 63.53,-51.846 64.668,-52.984 80.823,-52.984 84.196,-49.612 84.196,-44.261 84.475,-43.981 SPIN.10
Ap: C9.8@56.019,-43.546 R9.8 STM2.6 | length 8
  Top Layer w0.2: C9.8@56.019,-43.546 56.019,-40.234 56.264,-39.989 STM2.6 v1(59.649,-39.989) ; v1(60.198,-49.378) 60.93,-49.378 R9.8
Ap_RE: R9.1@60.93,-50.883 SPIN.3 | length 0.9
  Top Layer w0.2: v1(60.93,-51.791) R9.1@60.93,-50.883
AU: R18.1 STM2.20 | length 2.2
  Top Layer w0.2: STM2.20 v1(61.951,-37.989) ; v1(64.364,-40.402) 64.602,-40.64 R18.1
AU_R: N/P1.3 R17.1 R18.2 | length 7
  Top Layer w0.2: R17.1 66.687,-40.64 R18.2 68.92,-40.64 70.002,-39.558 N/P1.3
AVDD: C39.1 L4.2 RM3100.2@25.908,-31.79 | length 4.5
  Top Layer w0.2: L4.2 C39.1 26.859,-32.741 RM3100.2@25.908,-31.79
BD: R19.1 STM2.14 | length 5.6
  Top Layer w0.2: STM2.14 60.174,-41.124 64.377,-41.124 R19.1
BD_R: N/P2.1 R19.2 | length 5.2
  Top Layer w0.2: R19.2 66.79,-42.647 68.412,-42.647 68.758,-42.992 N/P2.1
Bm: 
Bp: C9.8@57.019,-43.546 R9.7 STM2.8 | length 15.2
  Top Layer w0.2: C9.8@57.019,-43.546 57.019,-42.393 57.174,-42.238 ; STM2.8 57.174,-42.238 ; R9.7 61.83,-49.784 61.728,-49.886 58.395,-49.886 58.166,-49.657 58.166,-44.25 57.912,-43.996 57.279,-43.996 57.174,-43.891 57.174,-42.238
Bp_RE: R9.2@61.83,-50.883 SPIN.2 | length 3.6
  Top Layer w0.2: R9.2@61.83,-50.883 61.83,-54.084 v1(62.146,-54.4)
BU: R21.1 STM2.19 | length 4.4
  Top Layer w0.2: v1(59.868,-38.049) 59.944,-38.049 60.384,-38.489 STM2.19 ; v1(64.364,-42.545) 64.364,-44.653 64.821,-45.11 65.29,-45.11 R21.1
BU_R: N/P2.3 R20.1 R21.2 | length 7.1
  Top Layer w0.2: R20.1 65.29,-43.661 65.891,-44.262 66.377,-44.262 66.79,-44.675 R21.2 68.834,-45.212 69.154,-44.892 N/P2.3
C1_SENS: C29.2 M1.24 | length 4.3
  Top Layer w0.2: C29.2 v1(50.865,-69.723) ; M1.24 54.913,-69.645 v1(54.991,-69.723)
C7: 
C12: C12.1 STM1.47 | length 3
  Top Layer w0.2: STM1.47 29.528,-60.02 29.96,-59.588 C12.1
C13: C13.2 STM1.19 | length 3
  Top Layer w0.2: STM1.19 39.853,-69.59 39.925,-69.663 C13.2
C16: C16.1 STM1.31 | length 3.7
  Top Layer w0.2: STM1.31 40.067,-63.59 40.792,-62.865 C16.1
C17: 
C23: C23.2 STM1.5 X2.2 | length 10.9
  Top Layer w0.2: STM1.5 31.028,-75.554 32.639,-77.165 C23.2 33.858,-79.564 34.313,-80.019 X2.2
C24: C24.1 R1.1 X2.1 | length 6.9
  Top Layer w0.2: C24.1 33.985,-84.52 34.186,-84.319 X2.1 37.389,-84.319 37.513,-84.443 R1.1
CAP_SENS_21: C30.1 M1.21 | length 4.4
  Top Layer w0.2: C30.1 53.262,-71.196 53.623,-70.835 M1.21
CD: R25.1 STM2.13 | length 9.9
  Top Layer w0.2: STM2.13 59.674,-41.453 59.776,-41.554 63.043,-41.554 63.551,-42.062 63.551,-44.971 R25.1
CD_R: N/P3.1 N/P3.3 R25.2 R27.2 | length 10.5
  Top Layer w0.2: R27.2 67.259,-49.657 67.361,-49.555 67.361,-47.383 ; R25.2 66.79,-46.812 67.361,-47.383 ; N/P3.3 70.714,-50.142 70.51,-49.939 70.51,-48.445 70.714,-48.242 ; N/P3.1 70.714,-48.242 ; 67.361,-47.383 68.22,-48.242 70.714,-48.242
CLKOUT: STM1.3 X1.4@28.78,-80.813 | length 8.9
  Top Layer w0.2: X1.4@28.78,-80.813 28.78,-75.822 30.028,-74.574 STM1.3
Cm: C33.2 R33.1 STM2.11 U2.1 | length 10
  Top Layer w0.2: v1(52.73,-44.399) 52.248,-44.399 51.435,-45.212 R33.1 51.462,-45.581 52.553,-46.672 52.553,-47.145 53.035,-47.628 U2.1 ; v1(58.191,-41.961) 58.674,-41.478 ; STM2.11 58.674,-41.478 ; C33.2 58.979,-43.369 58.674,-43.064 58.674,-41.478
CNV: ADC.11 SPI.5 STM1.40 | length 22.5
  Top Layer w0.2: STM1.40 33.028,-60.274 34.773,-58.53 34.773,-44.323 v1(37.567,-41.529) ; v1(71.831,-22.657) 72.025,-22.463 ADC.11
Cp: C9.8@57.519,-43.546 R9.6 STM2.9 | length 7.8
  Top Layer w0.2: C9.8@57.519,-43.546 57.519,-43.275 57.674,-43.12 ; STM2.9 57.674,-43.12 ; v1(59.03,-44.475) 57.674,-43.12 ; v1(60.046,-48.311) 62.382,-48.311 62.63,-48.558 R9.6
Cp_RE: R9.3 SPIN.1 | length 7.6
  Top Layer w0.2: R9.3 62.63,-52.629 63.602,-53.6 v1(66.319,-53.6)
  Bottom Layer w0.2: 79.559,-40.361 81.356,-40.361
CU: R27.1 STM2.18 | length 8.3
  Top Layer w0.2: v1(60.02,-38.989) STM2.18 ; v1(62.672,-43.266) 62.672,-46.645 64.821,-48.793 65.024,-48.793 65.29,-49.059 R27.1
CU_R: R26.1
FM_nCE: 128MB.1 "FLASH SPI.5" STM1.44 | length 23.9
  Top Layer w0.2: STM1.44 31.028,-60.223 34.163,-57.088 34.163,-50.569 34.036,-50.442 128MB.1 33.528,-50.442 33.528,-43.603 36.665,-40.466
FM_nHLD: 128MB.7 STM1.33 | length 11.8
  Top Layer w0.2: STM1.33 36.528,-59.439 40.233,-55.734 40.233,-52.096 40.617,-51.712 128MB.7
FM_nWP: 128MB.3 STM1.45 | length 6.7
  Top Layer w0.2: STM1.45 30.528,-60.198 31.623,-59.103 v1(31.623,-56.312) ; v1(32.233,-52.982) 128MB.3
GND: 128MB.4 "FLASH SPI.1" ADC.4 ADC.5 C1.2 C2.2 C3.2 C4.2 C5.2 C6.2 C7.1 C9.8@56.019,-44.846 C9.8@56.519,-44.846 C9.8@57.019,-44.846 C9.8@57.519,-44.846 C10.1 C11.2 C12.2 C13.1 C14.1 C15.1 C16.2 C17.2 C18.2 C19.2 C20.2 C21.1 C22.1 C23.1 C24.2 C25.2 C26.1 C27.1 C28.1 C29.1 C30.2 C31.1 C32.2 C33.1 C34.1 C35.1 C36.2 C37.2 C39.2 C40.2 C42.2 C43.2 C44.1 C53.2 C54.2 EPS.1 EPS.2 GPS.2@83.439,-76.327 GPS.2@83.439,-78.867 H1.4 H1.9 H2.4 H2.9 H3.4 H3.9 N/P1.5 N/P2.5 N/P3.5 OBC.2 OBC.4 R3.1 R33.2 R35.2 R36.1 R45.1 R48.1 RM3100.1@28.428,-31.79 RM3100.7@13.188,-8.89 SD.6 SD.10 SD.11 SD.12 SD.13 SPI.1 SPIN.11 SPINT-SWD.2 STM1.18 STM1.60 STM1.63 STM2.1 STM2.16 SWD1.2 SWD2.1 U2.2 X1.2@51.176,-33.725 X1.8 | length 1.2
  Top Layer w0.2: STM1.18 v1(39.606,-70.09)
  other v1: 48.133,-80.019 23.876,-79.475 27.534,-76.89 25.4,-76.014 59.182,-75.565 88.519,-74.676 59.133,-72.771 23.545,-70.104 22.387,-68.253 46.736,-67.437 49.554,-62.535 46.482,-58.739 67.945,-57.885 33.274,-56.49 76.2,-56.388 37.592,-55.626 28.018,-54.692 76.454,-53.67 29.613,-52.201 76.581,-51.499 80.137,-47.117 61.087,-46.217 63.457,-45.872 57.278,-45.716 36.957,-45.53 77.597,-45.212 52.767,-43.546 53.848,-42.978 76.327,-41.402 62.049,-40.043 79.121,-39.751 40.067,-38.627 83.439,-37.973 55.273,-37.211 51.409,-35.433 72.39,-30.734 70.866,-27.432 71.342,-17.145 75.692,-14.351 72.263,-10.485
GND_SEN: M1.13 M1.14 M1.15 M1.16 M1.17 M1.18 M1.19 M1.20 T1.3 T1.4 T1.11 T1.17 | length 35.8
  Top Layer w0.2: M1.13 M1.14@52.333,-66.996 ; T1.4 65.329,-67.396 65.329,-66.98 65.352,-66.957 ; T1.11 67.645,-66.096 T1.17 65.888,-66.421 65.352,-66.957 ; M1.18 M1.14@52.333,-66.996 ; M1.18 52.333,-73.762 52.562,-73.99 62.382,-73.99 62.865,-73.508 62.865,-67.259 63.378,-66.746 T1.3 65.352,-66.957 ; M1.18 M1.18@52.453,-68.861 ; M1.14@52.333,-66.996 M1.14 M1.15 M1.16 M1.17 52.368,-68.776 M1.18@52.453,-68.861 ; M1.18@52.453,-68.861 52.578,-68.986 53.193,-68.986 M1.20 M1.19 M1.18@52.453,-68.861
GPS_EN: C38.2 Q3.3 STM1.20 | length 16.3
  Top Layer w0.2: STM1.20 v1(39.726,-69.09) ; v1(45.261,-74.625) 53.442,-74.625 53.962,-75.146 53.962,-75.794 ; v1(51.308,-78.384) 51.943,-79.019 C38.2 ; v1(51.308,-75.082) 53.251,-75.082 53.962,-75.794 ; Q3.3 53.962,-75.794
GPS_ENPIN: GPS.2@63.373,-76.327 Q3.1 Q3.2 Q3.4 Q3.5 | length 11.3
  Top Layer w0.2: Q3.5 Q3.4 Q3.1@55.258,-76.327 ; Q3.2@54.61,-76.327 Q3.2 Q3.1 Q3.1@55.258,-76.327 ; GPS.2@63.373,-76.327 Q3.1@55.258,-76.327
GPS_RX: GPS.2@63.373,-78.867 R39.2 | length 12.8
  Top Layer w0.2: R39.2 52.947,-84.277 57.963,-84.277 GPS.2@63.373,-78.867
IN6: ADC.8 C51.2 | length 3
  Top Layer w0.2: C51.2 69.545,-20.914 70.52,-19.939 ADC.8
IN7: ADC.9 C52.2 | length 3.8
  Top Layer w0.2: C52.2 69.291,-22.331 69.88,-21.743 69.88,-21.07 70.51,-20.439 ADC.9
L_ST: R31.1 X1.3@53.726,-33.725 | length 4.1
  Top Layer w0.2: R31.1 52.971,-35.992 53.726,-35.237 X1.3@53.726,-33.725
MISO: ADC.14 RM3100.2@25.908,-8.89 SPI.3 STM1.22 | length 13.9
  Top Layer w0.2: SPI.3 25.781,-6.858 25.908,-6.985 RM3100.2@25.908,-8.89 ; STM1.22 39.548,-68.09 39.606,-68.148 43.332,-68.148 43.815,-67.666 43.815,-64.846 v1(43.586,-64.618) ; ADC.14 73.525,-22.293 73.889,-22.657 v1(74.092,-22.657)
MISO2: 128MB.2 "FLASH SPI.4" STM1.35 | length 41.5
  Top Layer w0.2: 128MB.2 32.512,-51.712 32.512,-42.079 34.125,-40.466 35.173,-39.419 35.247,-39.345 37.49,-39.345 38.811,-40.665 38.811,-48.586 39.933,-49.708 39.933,-55.336 35.528,-59.741 STM1.35
MOSI: ADC.12 RM3100.3@23.348,-8.89 SPI.4 STM1.23 | length 12.9
  Top Layer w0.2: SPI.4 23.241,-6.878 23.348,-6.985 RM3100.3@23.348,-8.89 ; STM1.23 v1(40.234,-67.59) ; ADC.12 72.525,-22.462 72.525,-22.911 ; v1(73.304,-27.534) 72.525,-26.754 72.525,-22.911 ; v1(73.525,-23.131) 72.746,-23.131 72.525,-22.911
MOSI2: 128MB.5 "FLASH SPI.3" STM1.36 | length 29.7
  Top Layer w0.2: STM1.36 35.028,-62.028 35.154,-62.154 38.506,-62.154 41.199,-59.461 41.199,-54.252 128MB.5 40.64,-54.252 40.538,-54.15 40.538,-52.629 40.818,-52.349 41.484,-52.349 41.814,-52.019 41.814,-51.39 41.453,-51.029 40.818,-51.029 40.386,-50.597 40.386,-48.743 40.056,-48.412 v1(40.056,-40.564)
MTx1: H1.6 STM1.61 | length 20.8
  Top Layer w0.2: H1.6 v1(16.993,-49.403) ; v1(21.59,-54.559) 21.59,-68.531 22.149,-69.09 STM1.61
MTx2: H1.5 STM1.62 | length 17.1
  Top Layer w0.2: H1.5 16.662,-49.911 v1(17.35,-50.599) ; v1(23.622,-56.871) 23.622,-57.963 28.092,-62.433 28.092,-69.438 27.94,-69.59 STM1.62
MTy1: H2.6 STM1.58 | length 14.8
  Top Layer w0.2: H2.6 16.459,-54.864 18.593,-56.998 v1(18.593,-58.344) ; v1(22.098,-61.849) 22.098,-66.233 23.455,-67.59 STM1.58
MTy2: H2.5 STM1.59 | length 2.4
  Top Layer w0.2: v1(16.002,-56.49) 16.002,-55.372 H2.5 ; v1(25.832,-68.097) 25.839,-68.09 STM1.59
MTz1: H3.6 STM1.56 | length 10.6
  Top Layer w0.2: H3.6 v1(18.567,-61.468) ; v1(23.19,-62.078) 23.19,-65.811 23.969,-66.59 STM1.56
MTz2: H3.5 STM1.57 | length 29.9
  Top Layer w0.2: H3.5 19.533,-61.976 20.574,-60.935 20.574,-54.661 21.209,-54.026 21.869,-54.026 22.098,-54.254 22.098,-60.706 22.679,-61.287 22.679,-65.732 24.038,-67.09 STM1.57
nRST: R2.1 R22.1 STM1.7 | length 21.4
  Top Layer w0.2: R22.1 24.181,-53.455 24.181,-58.002 24.587,-58.408 R2.1 26.734,-59.982 28.6,-61.849 v1(28.6,-69.266) ; v1(30.531,-71.196) 31.496,-71.196 32.028,-71.728 STM1.7
nRST_R: R22.2 SWD1.4 | length 10.6
  Top Layer w0.2: R22.2 24.181,-51.955 24.181,-52.502 24.261,-52.582 26.539,-52.582 30.211,-48.91 SWD1.4
NRST_S: R28.1 R32.2 STM2.4 | length 4.3
  Top Layer w0.2: R32.2 55.982,-38.989 ; v1(55.575,-38.583) 55.982,-38.989 ; STM2.4 55.982,-38.989 ; v1(64.922,-36.551) 64.922,-35.966 65.214,-35.675 R28.1
OBC_RX: OBC.3 R38.2 | length 7.2
  Top Layer w0.2: R38.2 80.76,-66.802 83.963,-66.802 OBC.3
OBC_TX: OBC.1 R37.2 | length 4.5
  Top Layer w0.2: R37.2 80.76,-65.372 81.997,-64.135 OBC.1
OUTX_1: H1.2 MGT.1 | length 8.4
  Top Layer w0.2: MGT.1 11.127,-48.895 H1.2
OUTX_2: H1.3 MGT.2 | length 4.6
  Top Layer w0.2: v1(10.414,-51.816) 12.827,-49.403 H1.3
OUTY_1: H2.2 MGT.5 | length 3.9
  Top Layer w0.2: v1(13.64,-56.795) 12.759,-55.914 12.759,-54.567 12.97,-54.356 H2.2
OUTY_2: H2.3 MGT.6 | length 0.8
  Top Layer w0.2: v1(13.259,-55.067) 13.462,-54.864 H2.3
OUTZ_1: H3.2 MGT.9 | length 6.8
  Top Layer w0.2: MGT.9 10.516,-60.795 10.681,-60.96 H3.2
OUTZ_2: H3.3 MGT.10 | length 14.2
  Top Layer w0.2: MGT.10 5.228,-64.414 5.888,-65.075 8.839,-65.075 12.446,-61.468 H3.3
PF0: R31.2 STM2.2 | length 2.4
  Top Layer w0.2: R31.2 54.964,-37.989 STM2.2
PhA: N/P1.4 N/P1.6 SPIN.5 SPIN.12 | length 4.4
  Top Layer w0.2: N/P1.4 73.238,-39.558 73.101,-39.421 73.101,-37.795 73.238,-37.658 N/P1.6 75.003,-37.658
PhB: N/P2.4 N/P2.6 SPIN.6 SPIN.13 | length 8.4
  Top Layer w0.2: N/P2.4 73.254,-44.892 73.101,-44.74 73.101,-43.144 73.254,-42.992 N/P2.6
  Bottom Layer w0.2: 80.035,-44.281 80.035,-41.986 80.67,-41.351 82.677,-41.351
PhC: N/P3.4 N/P3.6 SPIN.7 SPIN.14 | length 3.3
  Top Layer w0.2: N/P3.4 73.254,-50.142 73.101,-49.99 73.101,-48.362 73.221,-48.242 N/P3.6 N/P3.6@73.931,-48.128
R1: R1.2 STM1.6 | length 15
  Top Layer w0.2: STM1.6 31.528,-74.244 36.128,-78.844 37.235,-78.844 37.235,-81.829 38.349,-82.943 R1.2
R37: R37.1 STM1.16 | length 14.7
  Top Layer w0.2: STM1.16 36.528,-73.434 v1(38.075,-74.981) ; v1(71.081,-73.711) R37.1
R38: R38.1 STM1.17 | length 10.4
  Top Layer w0.2: STM1.17 40.459,-70.59 40.767,-70.282 v1(43.459,-70.282) ; v1(75.768,-70.282) 79.26,-66.79 R38.1
R39: R39.1 STM1.15 | length 27.9
  Top Layer w0.2: STM1.15 36.028,-74.981 36.638,-75.59 40.157,-75.59 41.3,-76.733 41.3,-79.529 40.234,-79.529 39.98,-79.783 39.98,-80.874 40.183,-81.077 49.948,-81.077 51.447,-82.575 R39.1
RM_CS: STM1.41
RST_ST: R28.2 SPINT-SWD.4 | length 3.4
  Top Layer w0.2: SPINT-SWD.4 65.024,-33.413 R28.2
SCL: M1.2 R15.1 STM1.29 STM2.27 SWD2.2 T1.1 | length 51.5
  Top Layer w0.2: STM1.29 42.503,-64.59 43.416,-63.678 R15.1@53.86,-63.678 ; SWD2.2 48.743,-32.791 57.099,-32.791 57.674,-33.366 STM2.27 57.674,-37.795 v1(58.852,-38.973) ; R15.1 R15.1@53.86,-63.678 ; M1.2 56.286,-68.286 ; T1.1 62.291,-65.446 v1(62.052,-65.684) 62.052,-65.337 59.944,-65.337 57.943,-67.338 57.943,-68.377 57.709,-68.611 56.88,-68.611 56.555,-68.286 56.286,-68.286 ; R15.1@53.86,-63.678 53.86,-64.821 54.292,-65.253 55.88,-65.253 56.49,-65.862 56.49,-68.083 56.286,-68.286
SCLK: ADC.13 RM3100.1@28.428,-8.89 SPI.2 STM1.21 | length 61.9
  Top Layer w0.2: SPI.2 28.321,-6.878 28.428,-6.985 RM3100.1@28.428,-8.89 ; v1(32.334,-57.709) 32.334,-54.356 31.293,-53.315 31.293,-42.683 32.766,-41.209 32.766,-39.786 39.37,-33.182 v1(39.37,-6.528) ; STM1.21 39.226,-68.588 40.242,-68.588 v1(40.437,-68.783) ; v1(73.025,-22.631) ADC.13
SCLK2: 128MB.6 "FLASH SPI.2" STM1.34 | length 2.3
  Top Layer w0.2: STM1.34 v1(36.028,-60.046) ; 128MB.6 41.656,-52.982 v1(41.656,-53.67)
SD_CLK: R11.1 SD.5 STM1.53 | length 5.6
  Top Layer w0.2: R11.1 12.954,-72.135 13.488,-72.669 ; SD.5 13.488,-72.669 ; v1(13.818,-71.323) 13.488,-71.653 13.488,-72.669 ; v1(25.72,-64.684) 26.126,-65.09 STM1.53
SD_CMD: R13.1 SD.7 STM1.54 | length 6.9
  Top Layer w0.2: SD.7 11.288,-73.04 11.303,-73.025 R13.1 11.328,-71.235 v1(12.179,-72.085) ; v1(23.834,-65.59) STM1.54
SD_DO: R12.1 SD.3 STM1.39 | length 5.2
  Top Layer w0.2: SD.3 15.688,-71.73 16.183,-71.235 R12.1@16.535,-71.235 ; v1(16.256,-70.485) 16.256,-70.587 16.535,-70.866 R12.1@16.535,-71.235 ; R12.1 R12.1@16.535,-71.235 ; v1(33.528,-62.349) STM1.39
SD_EN: Q1.3 R10.1 STM1.2 | length 11.7
  Top Layer w0.2: Q1.3 24.524,-77.013 24.753,-77.241 25.146,-77.241 R10.1 ; R10.1 25.882,-78.435 26.085,-78.638 27.813,-78.638 28.219,-78.232 28.219,-75.35 29.528,-74.041 STM1.2
SD_VCC: C14.2 C19.1 Q1.1 Q1.2 Q1.4 Q1.5 R11.2 R12.2 R13.2 SD.4 | length 29.5
  Top Layer w0.2: C14.2 9.738,-69.735 10.516,-69.735 ; R11.2 R11.2@12.713,-69.735 ; SD.4 14.588,-72.593 14.986,-72.195 C19.1 14.819,-71.185 15.689,-70.316 15.689,-70.063 16.017,-69.735 R12.2 16.891,-69.113 ; Q1.1 Q1.2 Q1.5 Q1.4 23.228,-73.507 18.834,-69.113 16.891,-69.113 ; 10.516,-69.735 R13.2 R11.2@12.713,-69.735 ; 10.516,-69.735 10.516,-69.444 10.846,-69.113 13.335,-69.113 ; R11.2@12.713,-69.735 13.335,-69.113 ; 13.335,-69.113 16.891,-69.113
SDA: M1.4 R14.1 STM1.30 STM2.28 SWD2.3 T1.2 | length 60.6
  Top Layer w0.2: STM1.30 42.062,-64.09 42.545,-63.607 42.545,-62.382 42.824,-62.103 47.981,-62.103 49.073,-61.011 53.238,-61.011 53.442,-61.214 ; SWD2.3 50.089,-38.151 53.467,-38.151 53.619,-37.998 53.619,-37.262 53.772,-37.109 ; v1(52.349,-61.214) 53.442,-61.214 ; R14.1 53.86,-61.632 53.442,-61.214 ; v1(55.169,-57.277) 55.169,-48.971 55.982,-48.158 57.455,-48.158 57.861,-47.752 57.861,-44.501 57.656,-44.296 55.955,-44.296 55.677,-44.018 55.677,-41.58 55.474,-41.377 53.899,-41.377 53.772,-41.25 53.772,-37.109 ; M1.4 55.677,-67.426 55.778,-67.324 55.778,-65.964 v1(55.575,-65.761) ; STM2.28 57.174,-36.627 54.254,-36.627 53.772,-37.109 ; v1(63.988,-66.096) v1(64.16,-66.096) T1.2
  Bottom Layer w0.2: 63.725,-66.531 v1(64.16,-66.096)
SENS_EN: Q2.3 R9.2@51.308,-58.94 STM1.28 | length 9.6
  Top Layer w0.2: STM1.28 43.045,-65.09 v1(43.089,-65.133) ; v1(51.918,-56.667) 51.918,-58.838 51.308,-58.94 52.172,-58.94 52.438,-58.674 Q2.3
SENS_VDD: C26.2 C27.2 L2.2 M1.22 M1.23 | length 15.9
  Top Layer w0.2: M1.22 M1.23 54.483,-70.104 54.788,-70.409 58.318,-70.409 58.852,-69.875 58.852,-67.056 59.293,-66.615 C26.2 60.96,-66.615 ; L2.2 58.852,-62.103 59.69,-62.941 v1(59.69,-63.627) ; v1(60.173,-65.837) 60.574,-66.234 60.96,-66.615 ; C27.2 60.96,-66.615
  Bottom Layer w0.2: 59.69,-65.405 v1@60.173,-65.888
SETC: 
SETP: 
SP: R48.2 SPIN.15 | length 5.6
  Top Layer w0.2: SPIN.15 85.84,-40.656 R48.2
SS1: ADC.7 C50.2 R41.1 | length 10.1
  Top Layer w0.2: R41.1 67.31,-14.529 67.843,-15.062 67.843,-19.182 68.072,-19.41 C50.2 69.799,-19.41 69.828,-19.439 ADC.7
SS1_R: R41.2 SUN.2 | length 3.9
  Top Layer w0.2: R41.2 67.335,-11.188 67.335,-9.55 67.901,-8.985 SUN.2
SS2: ADC.6 C49.2 R40.1 | length 10.4
  Top Layer w0.2: C49.2 68.648,-18.001 69.587,-18.939 70.619,-18.939 ; R40.1 69.406,-12.688 70.619,-13.9 70.619,-18.939 ; ADC.6 70.619,-18.939
SS2_R: R40.2 SUN.4 | length 3.7
  Top Layer w0.2: R40.2 69.393,-11.188 69.811,-10.77 69.811,-10.516 SUN.4
SS3: ADC.19 C45.1 R42.1 | length 9.1
  Top Layer w0.2: ADC.19 75.405,-19.439 77.572,-17.272 ; R42.1 76.962,-16.866 77.572,-17.272 ; C45.1 77.572,-17.272
SS3_R: R42.2 SUN.6 | length 4.6
  Top Layer w0.2: SUN.6 75.745,-11.388 R42.2
SS4: ADC.18 C46.1 R43.1 | length 10.4
  Top Layer w0.2: ADC.18 75.387,-19.939 76.678,-18.648 C46.1 78.421,-18.15 78.726,-18.15 79.045,-17.831 79.045,-16.612 78.613,-16.18 R43.1
SS4_R: R43.2 SUN.8 | length 4.6
  Top Layer w0.2: SUN.8 75.985,-9.628 75.985,-10.257 76.221,-10.493 77.616,-10.493 78.511,-11.388 R43.2
SU_TH_GO: ADC.16 C48.1 R46.1 | length 5.1
  Top Layer w0.2: ADC.16 74.905,-20.939 74.905,-21.201 75.387,-21.684 C48.1 R46.1@78.421,-22.76
SU_TH_RET: 
SUN_GND: ADC.10 C41.2 C45.2 C46.2 C47.2 C48.2 C49.1 C50.1 C51.1 C52.1 R45.2 R46.2 SUN.3 SUN.5 SUN.7 SUN.9 | length 55.4
  Top Layer w0.2: ADC.10 70.942,-20.939 70.934,-23.574 R45.2 67.867,-23.574 67.134,-22.841 C52.1 C51.1 C50.1 C49.1 67.134,-16.639 66.446,-15.951 66.446,-12.344 66.04,-11.938 63.703,-11.938 63.576,-11.811 63.576,-7.606 C41.2 64.262,-6.299 64.541,-6.02 70.377,-6.02 SUN.3 SUN.5 SUN.7 ; SUN.9 79.578,-9.221 79.578,-17.272 C45.2 C46.2 C47.2 C48.2 79.821,-22.937 R46.2
SUN_P2: C41.1 L1.2 SUN.1 | length 8.6
  Top Layer w0.2: L1.2 C41.1 68.007,-8.32 SUN.1
SWCLK: R24.1 STM1.49 | length 12.8
  Top Layer w0.2: R24.1 22.53,-53.455 22.53,-60.668 24.952,-63.09 STM1.49
SWCLK_R: R24.2 SWD1.1 | length 5.5
  Top Layer w0.2: R24.2 22.535,-49.251 22.591,-49.194 SWD1.1
SWCLK_RS: R30.2 SPINT-SWD.1 | length 5.7
  Top Layer w0.2: SPINT-SWD.1 60.464,-34.175 R30.2
SWCLK_S: R30.1 STM2.22 | length 2.6
  Top Layer w0.2: STM2.22 60.174,-36.258 60.757,-35.675 R30.1
SWDIO: R23.1 STM1.46 | length 11.5
  Top Layer w0.2: R23.1 28.538,-53.455 30.632,-55.55 30.632,-59.492 30.028,-60.096 STM1.46
SWDIO_R: R23.2 SWD1.3 | length 6.2
  Top Layer w0.2: R23.2 25.959,-51.955 25.959,-48.194 SWD1.3
SWDIO_RS: R29.2 SPINT-SWD.3 | length 3.6
  Top Layer w0.2: SPINT-SWD.3 62.484,-32.029 63.754,-33.299 R29.2
SWDIO_S: R29.1 STM2.21 | length 3.8
  Top Layer w0.2: STM2.21 61.381,-37.489 63.195,-35.675 R29.1
VDDA: L3.2 STM2.5 | length 3
  Top Layer w0.2: L3.2 54.394,-40.213 55.118,-39.489 STM2.5
Vm: C32.1 R34.2 R35.1 STM2.12 | length 12.7
  Top Layer w0.2: R34.2 R35.1 61.257,-47.811 61.722,-47.346 C32.1 61.163,-45.277 61.062,-45.175 61.062,-42.164 60.884,-41.986 59.301,-41.986 59.174,-41.859 STM2.12
VSS_GND: C8.2 R3.2 STM1.12 | length 10.6
  Top Layer w0.2: STM1.12 34.528,-75.537 37.87,-78.879 R3.2 40.066,-78.879 40.116,-78.929 C8.2
pads on no net: 128MB.9 ADC.21 C31.2 Designator1.1 Designator1.2 Designator1.3 Designator1.4 Designator1.5 EPS.7 EPS.8 EPS.9 EPS.10 GPS.2@63.373,-81.407 GPS.2@63.373,-83.947 GPS.2@63.373,-86.487 GPS.2@83.439,-81.407 GPS.2@83.439,-83.947 GPS.2@83.439,-86.487 M1.9 M1.10 M1.11 M1.12 MGT.3 MGT.4 MGT.7 MGT.8 R6.1 R6.2 RM3100.4 RM3100.5 RM3100.6 RM3100.7@13.188,-31.79 SD.1 SD.2 SD.8 SD.9 SD.14 SPIN.8 SPIN.9 STM1.4 STM1.8 STM1.9 STM1.10 STM1.11 STM1.14 STM1.24 STM1.25 STM1.26 STM1.27 STM1.37 STM1.38 STM1.42 STM1.43 STM1.50 STM1.51 STM1.52 STM1.55 STM2.3 STM2.10 STM2.23 STM2.24 STM2.25 STM2.26 T1.5 T1.6 T1.7 T1.8 T1.9 T1.10 T1.13 T1.14 T1.15 T1.16 X1.1@51.176,-29.775 X1.2@26.805,-80.638 X1.3@27.805,-80.638 X1.6 X1.7

## Polygon pours and split planes (outlines as drawn)
GND on Top Layer "GND_L01_P001" (solid, pour order 1): 0,-92.456 92.583,-92.456 92.583,0 0,0
GND on Bottom Layer "GND_L02_P002" (solid, pour order 2): 0,-92.456 92.583,-92.456 92.583,0 0,0

## Silkscreen, mask and mechanical layers (free items; w line width, h text height)
Top Overlay:
  drawing of 902 lines, arcs and shapes, not listed
  text "ADCS" at 38.227,-11.176 h10
  text "MISO" at 34.544,-38.773 h0.8 r90
  text "MOSI" at 32.004,-38.822 h0.8 r90
  text "nCE" at 37.084,-38.822 h0.8 r90
  text "GND" at 26.797,-38.9 h0.8 r90
  text "SCLK" at 29.464,-38.893 h0.8 r90
  text "." at 24.765,-83.566 h1.52

## Text inside footprints (layer, text, board x,y; h text height)
ADC: Mechanical 13 "*" at 73.64,-18.136 h1.27 r270
STM1: Mechanical 13 "*" at 29.413,-71.831 h1.27 r90
T1: Mechanical 13 "*" at 65.415,-65.756 h1.27
U2: Mechanical 13 "*" at 54.178,-48.161 h1.27